# Altium PCB PCB1.PcbDoc
Units mm, origin at the board's own origin, x right, y up, seen from the top; angles counter-clockwise.
Board outline 152.4 x 101.6 mm, 2 copper layers (Top Layer, Bottom Layer); 6 components, 0 nets, 58 pads, 0 vias.
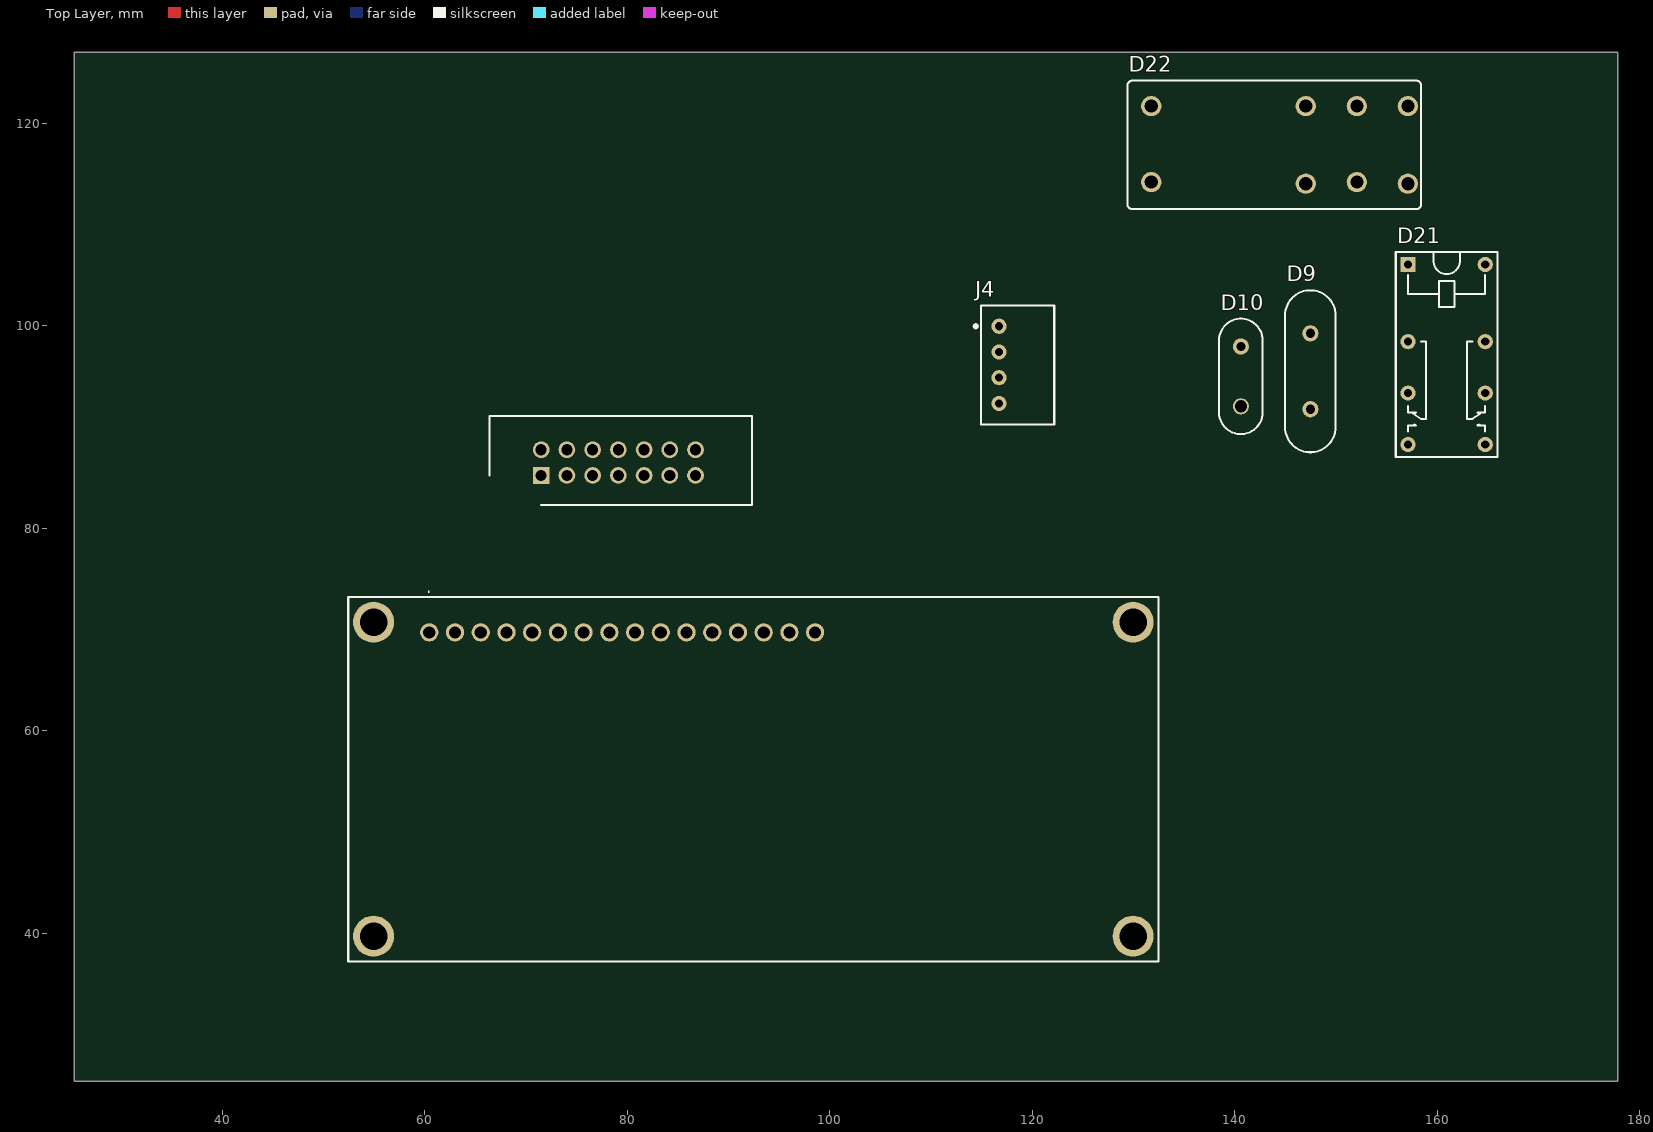
[diagram p0: Top Layer view]
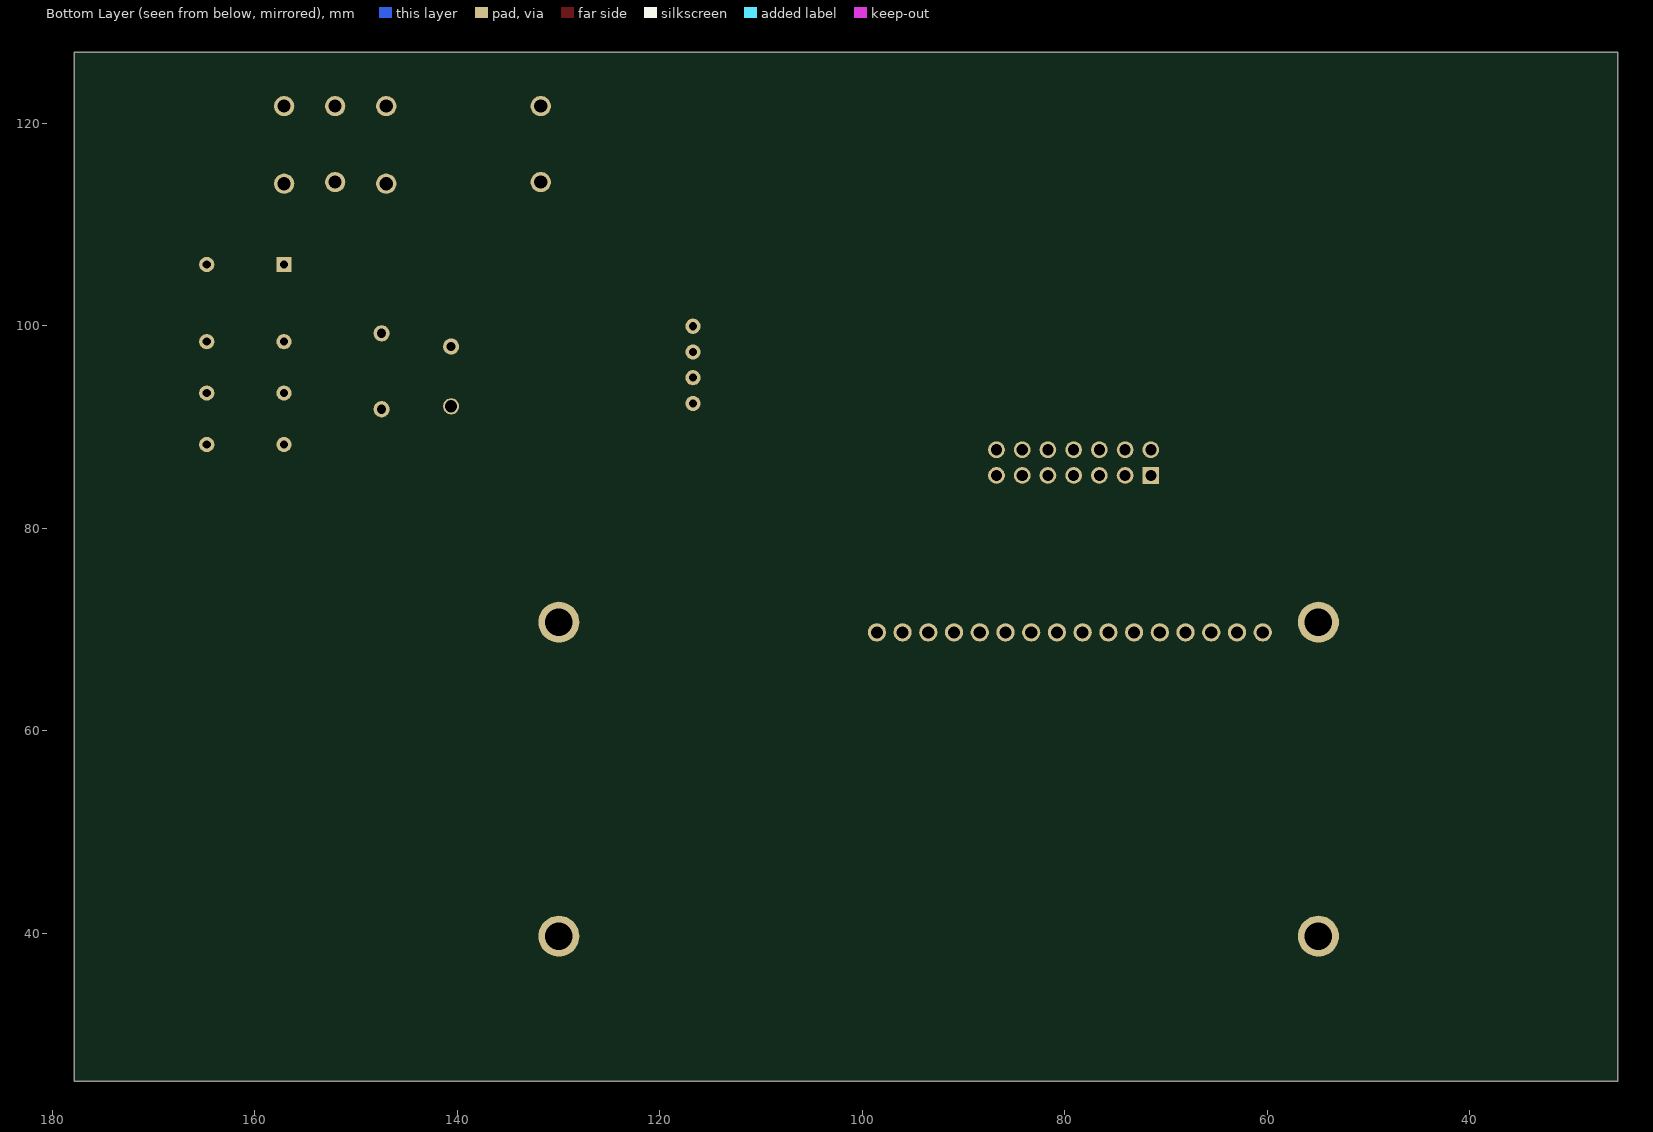
[diagram p1: Bottom Layer view, seen from below]

## Layer stack, top to bottom
Top Solder: solder mask 0.0102, Solder Resist, Dk 3.5
Top Layer: signal copper 0.0356
Dielectric 1: dielectric 0.32, FR-4, Dk 4.8
Bottom Layer: signal copper 0.0356
Bottom Solder: solder mask 0.0102, Solder Resist, Dk 3.5

## Board outline
25.4,25.4 177.8,25.4 177.8,127 25.4,127

## Design rules (kind name [scope] priority, off if disabled: settings)
Clearance [All] p1: gap=0.254 ignorepadtopadclearanceinfootprint=FALSE except(0: Arc-Hole Track-Hole SMDPad-Hole THPad-Hole Via-Hole Fill-Hole Poly-Hole Region-Hole Text-Hole)
PolygonConnect [All] p1: connectstyle=Relief reliefconductorwidth=0.254 reliefentries=4 polygonreliefangle="90 Angle" airgapwidth=0.254
RoutingVias [All] p1: holewidth=0.711 width=1.27 viastyle="Through Hole" minholewidth=0.711 minwidth=1.27 maxholewidth=0.711 maxwidth=1.27
SolderMaskExpansion [All] p1: expansion=0.102
Width [All] p1: maxlimit=0.254 minlimit=0.254 preferedwidth=0.254
30 further rules are at their usual default settings.

## Components (designator, comment, footprint, x,y, rotation, side; value= is the part's Value field where it differs from the comment)
D9 "Comment" CAPRB_MURATA_DEBE33D103ZA3B 147.447,95.504 r90 top
D10 "Comment" CAPRR590-430X1140X910 140.589,94.996 r90 top
D21 "Comment" REL_TYCO-AXICOM_MT2 160.909,97.155 r270 top
D22 "Comment" REL_TYCO_SCHRACK_RT31XXXX 143.891,117.856 r0 top
J4 "Comment" DCDC_TRACO_TME24 116.713,96.139 r270 top
? "" SHDR14W64P254_2X7_2540X878X955P 71.501,85.217 r0 top

## Footprints (in the part's own frame and the unit in brackets; to place one, negate y for a bottom-side part, rotate by r counter-clockwise, add the part's x,y. Pads: shape width x height; smd on the part's side, far side on the other; paste and mask are expansions set on the pad)
CAPRB_MURATA_DEBE33D103ZA3B [mm] "Capacitor Radial Button, Pin spacing 7.5mm - Body Diameter  16mm X Body Width 5mm X Body Height 19mm"
  round 1.6 hole 0.9: 1(-3.75,0) 2(3.75,0)
  silkscreen extent -8,-2.5 8,2.5, body extent -8,-2.5 8,2.5, height 19
CAPRR590-430X1140X910 [mm] "Capacitor Radial Rounded, Pin spacing 5.9mm - Body With 4.3mm X Body Length 11.4mm X Body Height 9.1mm"
  round 1.6 hole 1.2: 1(-2.95,0)
  round 1.6 hole 0.9: 2(2.95,0)
  silkscreen extent -5.7,-2.15 5.7,2.15, body extent -5.7,-2.15 5.7,2.15, height 10.95
DCDC_TRACO_TME24 [mm] "TME Series , Body 11.75x7.25mm, SIP-4 Package"
  round 1.5 hole 0.8: 1(-3.81,0) 2(-1.27,0) 3(1.27,0) 4(3.81,0)
  silkscreen extent -5.88,-2.45 5.88,5.45, body extent -5.87,-1.8 5.88,5.45, height 10.45
REL_TYCO-AXICOM_MT2 [mm] "8 Leads, Row Spacing 7.62 mm; Body 20.25mm x 10.05mm, AXICOM MT2 Serie"
  rect 1.5x1.5 hole 0.8: 1(-8.89,-3.81)
  round 1.5 hole 0.8: 4(-1.27,-3.81) 6(3.81,-3.81) 8(8.89,-3.81) 9(8.89,3.81) 11(3.81,3.81) 13(-1.27,3.81) 16(-8.89,3.81)
  silkscreen extent -10.13,-5.03 10.13,5.03, body extent -10.12,-5.02 10.13,5.03, height 11.7
REL_TYCO_SCHRACK_RT31XXXX [mm] "8 Leads, Row Spacing 7.62 mm; Body 29mm x 12.7mm, TYCO RT Serie"
  round 2 hole 1.3: 11(8.15,-3.67) 11(8.15,3.83) 12(3.11,-3.83) 12(3.11,3.83) 14(13.19,-3.83) 14(13.19,3.83) A1(-12.15,-3.67) A2(-12.15,3.83)
  silkscreen extent -14.5,-6.35 14.5,6.35, body extent -14.5,-6.35 14.5,6.35, height 15.7
SHDR14W64P254_2X7_2540X878X955P [mm]
  rect 1.65x1.65 hole 1.1: 1(0,0)
  round 1.65 hole 1.1: 2(0,2.54) 3(2.54,0) 4(2.54,2.54) 5(5.08,0) 6(5.08,2.54) 7(7.62,0) 8(7.62,2.54) 9(10.16,0) 10(10.16,2.54) 11(12.7,0) 12(12.7,2.54) 13(15.24,0) 14(15.24,2.54)
  silkscreen extent -5.08,-2.93 20.83,5.85, body extent -5.08,-3.12 20.32,5.66, height 9.55

## Part data
D9: library part CCR_10NF_2KV_+80%-20%_MURATA_DEBE33D103ZA3B
D10: library part CMIC_39PF_500V_0.5PF_590-430X11400X910
D21: library part REL_TYCO-AXICOM_C93401
D22: library part REL_TYCO_SCHRACK_RT314012
J4: library part "TME 2405S"

## Free pads (board coordinates)
  round 1.8 hole 1.2: 1(60.452,69.723) 2(62.992,69.723) 3(65.532,69.723) 4(68.072,69.723) 5(70.612,69.723) 6(73.152,69.723) 7(75.692,69.723) 8(78.232,69.723) 9(80.772,69.723) 10(83.312,69.723) 11(85.852,69.723) 12(88.392,69.723) 13(90.932,69.723) 14(93.472,69.723) 15(96.012,69.723) 16(98.552,69.723)
  round 4.05 hole 2.7: MH1(54.952,70.723) MH2(54.952,39.723) MH3(129.952,39.723) MH4(129.952,70.723)

## Nets (pads, with @x,y where several pads share a name; then routed paths per layer and width w, separated by ;. In a path a pad name is that pad's centre, name@x,y a point inside that pad or via, vN(x,y) a via of type N, cw(c..) or ccw(c..) an arc to the next point about the centre after c; other vN are vias at no path point)
pads on no net: ?.1 ?.2 ?.3 ?.4 ?.5 ?.6 ?.7 ?.8 ?.9 ?.10 ?.11 ?.12 ?.13 ?.14 D9.1 D9.2 D10.1 D10.2 D21.1 D21.4 D21.6 D21.8 D21.9 D21.11 D21.13 D21.16 D22.11 D22.12 D22.14 D22.A1 D22.A2 J4.1 J4.2 J4.3 J4.4

## Silkscreen, mask and mechanical layers (free items; w line width, h text height)
Top Overlay:
  lines w0.1: 60.352,73.723 ccw(c60.402,73.723) 60.452,73.723 ccw(c60.402,73.723) 60.352,73.723
  lines w0.2: 52.452,37.223 132.452,37.223 132.452,73.223 52.452,73.223 52.452,37.223
Mechanical 13:
  lines w0.1: 52.452,37.223 132.452,37.223 132.452,73.223 52.452,73.223 52.452,37.223
Mechanical 15:
  lines w0.1: 51.452,36.223 133.452,36.223 133.452,74.223 51.452,74.223 51.452,36.223

## Dimensions
131.741,121.686 to 152.041,121.686 on Mechanical 1
164.719,106.045 to 164.719,93.345 on Mechanical 1
157.099,88.265 to 164.719,88.265 on Mechanical 1
164.719,93.345 to 164.719,88.265 on Mechanical 1
164.719,98.425 to 164.719,93.345 on Mechanical 1
140.589,97.946 to 140.589,92.046 on Mechanical 1
147.447,99.254 to 147.447,91.754 on Mechanical 1
123.444,90.297 to 123.698,101.981 on Mechanical 1
114.935,89.281 to 122.174,88.9 on Mechanical 1
129.952,70.723 to 129.952,39.723 on Mechanical 1
54.952,70.723 to 129.952,70.723 on Mechanical 1
84.201,87.757 to 86.741,87.757 on Mechanical 1
86.741,87.757 to 86.741,85.217 on Mechanical 1

## Text inside footprints (layer, text, board x,y; h text height)
J4: Mechanical 14 "+Vout" at 117.983,91.954 h0.75; Mechanical 14 "-Vout" at 117.983,94.494 h0.75; Mechanical 14 "+Vin" at 117.983,97.034 h0.75; Mechanical 14 "-Vin" at 117.983,99.574 h0.75; Mechanical 14 "4" at 115.18,91.954 h0.75; Mechanical 14 "1" at 115.305,99.574 h0.75